# Altium PCB Transmitter.PcbDoc
Units mm, origin at the board's own origin, x right, y up, seen from the top; angles counter-clockwise.
Board outline 22.73 x 16.89 mm, 2 copper layers (Top Layer, Bottom Layer); 9 components, 9 nets, 44 pads, 2 vias.
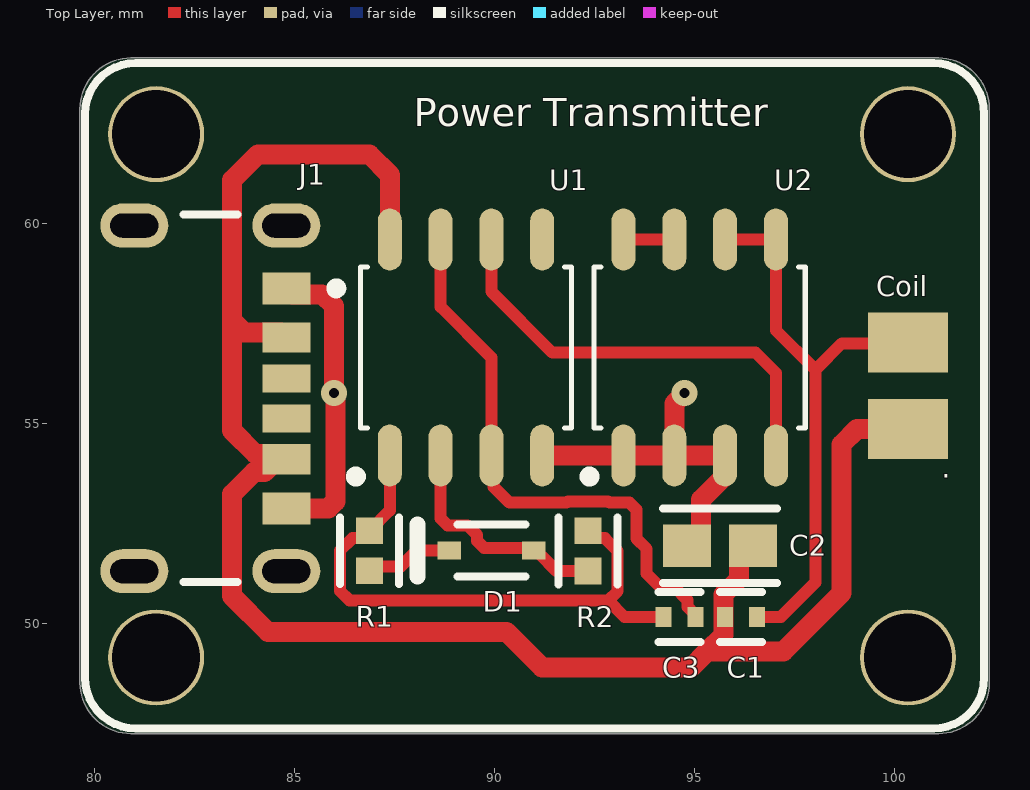
[diagram p0: Top Layer view]
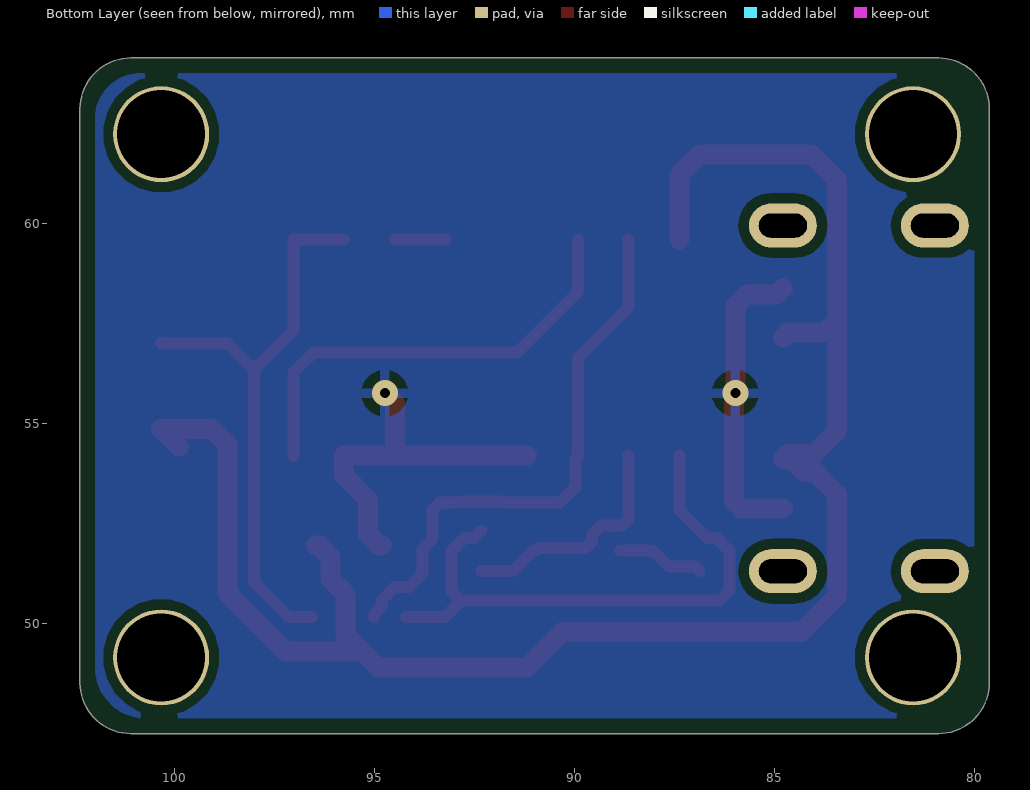
[diagram p1: Bottom Layer view, seen from below]
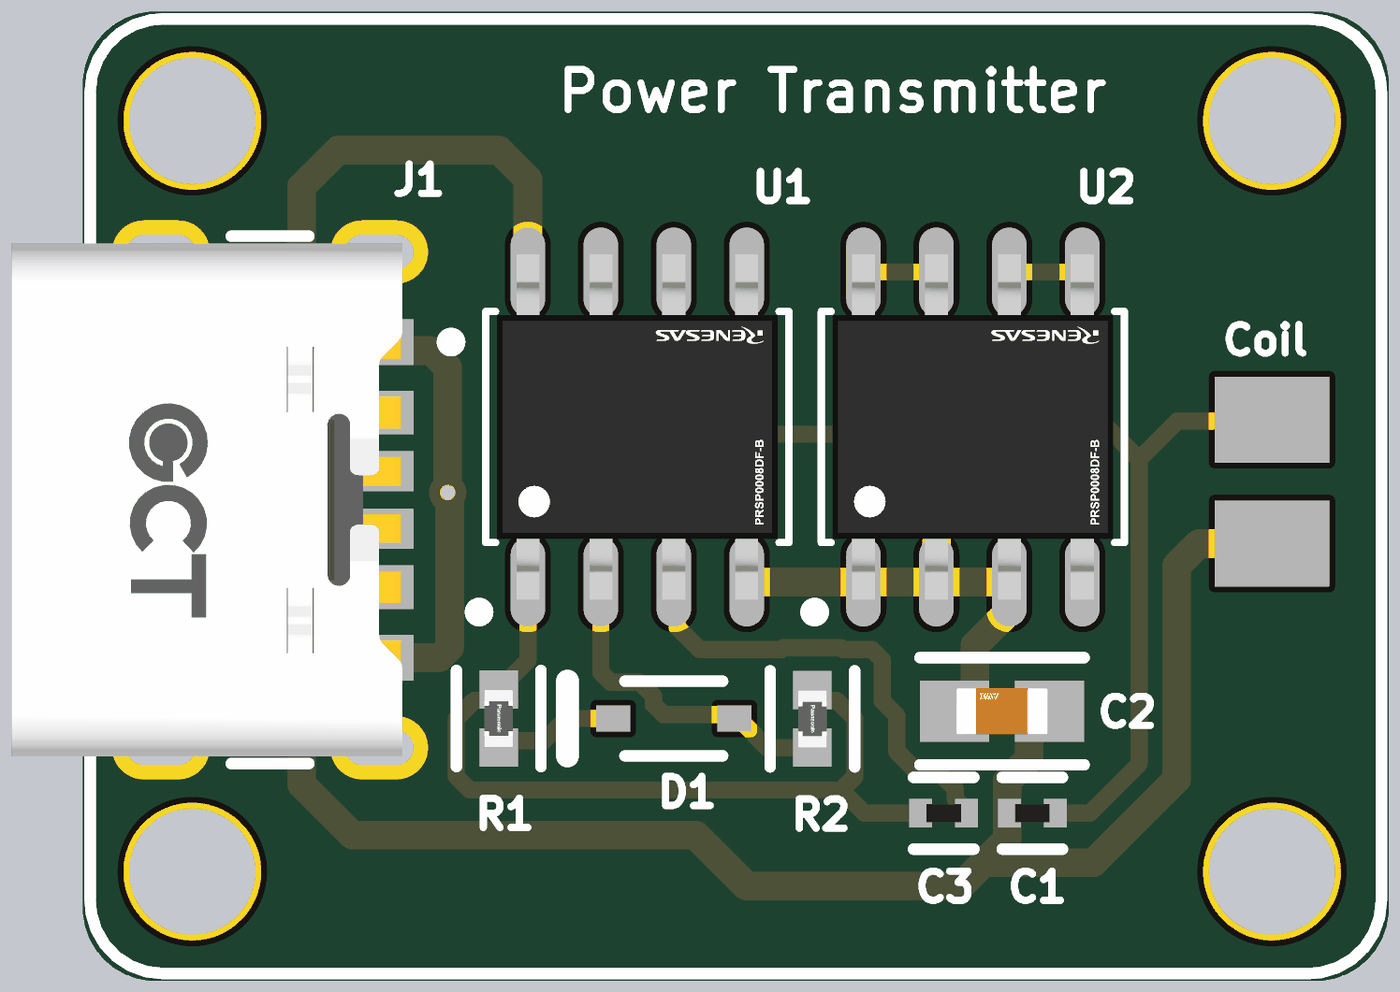
[diagram p2: 3D render of the assembled board from above, using the file's embedded part models]

## Layer stack, top to bottom
Top Solder: solder mask 0.0102, Solder Resist, Dk 3.5
Top Layer: signal copper 0.0356
Dielectric 1: dielectric 0.32, FR-4, Dk 4.8
Bottom Layer: signal copper 0.0356
Bottom Solder: solder mask 0.0102, Solder Resist, Dk 3.5

## Board outline
79.629,48.514 ccw(c80.899,48.514) 80.899,47.244 101.092,47.244 ccw(c101.092,48.514) 102.362,48.514 102.362,62.865 ccw(c101.092,62.865) 101.092,64.135 80.899,64.135 ccw(c80.899,62.865) 79.629,62.865

## Design rules (kind name [scope] priority, off if disabled: settings)
Clearance [All] p1: gap=0.1 ignorepadtopadclearanceinfootprint=FALSE
PolygonConnect [All] p1: connectstyle=Relief reliefconductorwidth=0.254 reliefentries=4 polygonreliefangle="90 Angle" airgapwidth=0.254
RoutingVias [All] p1: holewidth=0.711 width=1.27 viastyle="Through Hole" minholewidth=0.711 minwidth=1.27 maxholewidth=0.711 maxwidth=1.27
SilkToSilkClearance [All] p1: silktosilkclearance=0.2
SilkToSolderMaskClearance [IsPad] p1: minsilkscreentomaskgap=0.2 clearancetoexposedcopper=TRUE
SolderMaskExpansion [All] p1: expansion=0.102 istentingtop=FALSE
SupplyNets "Schematic Supply Nets_1" [InNet('+5V')] p1: voltage=0.000
SupplyNets "Schematic Supply Nets" [InNet('GND')] p2: voltage=0.000
Width [All] p1: maxlimit=0.5 minlimit=0.254 preferedwidth=0.3
28 further rules are at their usual default settings.

## Components (designator, comment, footprint, x,y, rotation, side; value= is the part's Value field where it differs from the comment)
C1 "39nF" FP-GRM15-MFG 96.158,50.165 r180 top value=0.10μF
C2 "10uF/25V" FP-0603-L_1_6_0_15-W_0_81-IPC_A 95.631,51.943 r180 top
C3 "120pF" FP-GRM15-MFG 94.615,50.165 r180 top value=0.10μF
D1 "1N4148WS-7-F" DIOD-SOD323-2-A_V 89.916,51.816 r180 top
J1 "USB4125-GF-A-0190" FP-USB4125-GF-A-0190-MFG 81.788,55.626 r270 top
R1 "10k" FP-ERJ2RK-IPC_A 86.868,51.816 r270 top
R2 "33k" FP-ERJ2RK-IPC_A 92.329,51.81 r270 top
U1 "XKT - 408" SOP127P600X173-8_PRSP0008DF-B_N 89.281,56.896 r90 top
U2 "T5336" SOP127P600X173-8_PRSP0008DF-B_N 95.123,56.896 r90 top

## Footprints (in the part's own frame and the unit in brackets; to place one, negate y for a bottom-side part, rotate by r counter-clockwise, add the part's x,y. Pads: shape width x height; smd on the part's side, far side on the other; paste and mask are expansions set on the pad)
DIOD-SOD323-2-A_V [mm] "SOD-323, 2-Leads, Body 1.7x1.3mm"
  rect 0.59x0.45 smd: 1(-1.055,0) 2(1.055,0)
  silkscreen extent -0.85,-0.65 1.85,0.65, body extent -0.85,-0.65 0.85,0.65, height 1.2
FP-0603-L_1_6_0_15-W_0_81-IPC_A [mil]
  rect 47.5x42.06 smd paste+0 mask+0: 1(-32.51,0) 2(32.51,0)
  silkscreen extent -56,-37 56,37, body extent -76,-41 76,41, height 10
FP-ERJ2RK-IPC_A [mm]
  rect 0.668x0.672 smd paste+0 mask+0: 1(-0.502,0) 2(0.502,0)
  silkscreen extent -0.84,-0.74 0.84,0.74, body extent -1.04,-0.54 1.04,0.54, height 0.25
FP-GRM15-MFG [mm]
  rect 0.4x0.5 smd paste+0 mask+0: 1(-0.4,0) 2(0.4,0)
  silkscreen extent -0.53,-0.63 0.53,0.63, body extent -0.7,-0.38 0.7,0.38, height 0.25
FP-USB4125-GF-A-0190-MFG [mm]
  rrect100% 1.1x1.7 hole 1.2 slot 0.6 at 0 deg paste-2539.97 mask+0: 1(-4.32,3) 2(4.32,3) 3(-4.32,-0.8) 4(4.32,-0.8)
  rect 0.7x1.2 smd paste+0 mask+0: A5(-0.5,3) B5(0.5,3)
  rect 0.76x1.2 smd paste+0 mask+0: A9(1.52,3) B9(-1.52,3)
  rect 0.8x1.2 smd paste+0 mask+0: A12(2.75,3) B12(-2.75,3)
  silkscreen extent -4.59,0.43 4.59,4.38, body extent -4.97,-3.57 4.97,3.95, height 0.25
SOP127P600X173-8_PRSP0008DF-B_N [mm] "SOP, 8-Leads, Body 5.02x3.90mm, Pitch 1.27mm, IPC Medium Density"
  rrect100% 1.55x0.6 smd: 1(-2.7,1.905) 2(-2.7,0.635) 3(-2.7,-0.635) 4(-2.7,-1.905) 5(2.7,-1.905) 6(2.7,-0.635) 7(2.7,0.635) 8(2.7,1.905)
  silkscreen extent -3.35,-2.64 2.01,2.88, body extent -3.72,-2.83 3.73,2.83, height 0.25

## Part data
C1 C3: library part CMP-2100-03641-2, "CAP CER 0.1UF 16V X7R 0402", Capacitance=0.10μF, Manufacturer=Murata, Manufacturer Part Number=GRM155R71C104KA88D, Package=GRM15, Temperature="-55°C to +125°C", Temperature Characteristic=X7R, Temperature Range High=+125°C, Temperature Range Low=-55°C, Tolerance=10%, Voltage Rating=16Vdc, Category=Cap, ComponentLink2Description=Datasheet, ComponentLink2URL=https://search.murata.co.jp/Ceramy/image/img/A01X/G101/ENG/GRM155R71H471KA01-01A.pdf, Device Class L1="Passive Components", Device Class L2=Capacitors, Device Class L3="Ceramic Capacitors", Digikey Description="CAP CER 0.1UF 16V X7R 0402", Height=0.55mm, Ipc Land Pattern Name=CAPC10050X219, Lead Free=yes, Material=Ceramic, Mouser Description="0402 0.1 uF 16V ±10 % Tolerance X7R SMT Multilayer Ceramic Capacitor", Octopart=https://octopart.com/grm155r71c104ka88d-murata-196880, RoHS=TRUE, Standoff Height=0mm
C2: library part CMP-2006-04378-2, "General Purpose Ceramic Capacitor, 0603, 1nF, 10%, X7R, 15%, 50V", Capacitance=1nF, Case Code (Imperial)=0603, Case Code (Metric)=1608, Dielectric=X7R, Dielectric Material=Ceramic, Max Operating Temperature=125°C, Min Operating Temperature=-55°C, Package Quantity=4000, Tolerance=10%, Voltage=50V, Case/Package=0603, Construction=Flat, Contact Plating=Tin, Depth=0.81mm, Height=0.9mm, Lead Free="Lead Free", Length=1.6mm, Mount="Surface Mount", Number of Pins=2, Packaging="Tape and Reel", Radiation Hardening=No, REACH SVHC="No SVHC", RoHS Compliant=Yes, Series=-, Termination=SMD/SMT, Thickness=0.035inch, Voltage Rating=50V, Voltage Rating (DC)=50V, Weight=7.1E-05oz, Width=0.032inch
D1: library part CMP-1667-00004-1, "Fast Switching Diode, 75 V, 0.3 A, -65 to 150 degC, 2-Pin SOD323, RoHS, Tape and Reel", ComponentLink1Description="Manufacturer URL", ComponentLink1URL=http://www.diodes.com/, ComponentLink2Description=Datasheet, ComponentLink2URL=http://www.diodes.com/datasheets/ds30097.pdf, DatasheetVersion="Rev. 25-2, 03/2016", PackageDescription="2-Pin Small Outline Diode, Body 1.7 x 1.3 mm", PackageReference=SOD323-2
J1: library part CMP-245163-000004-1, "CONN RCPT TYPE C 6P SMD RA"
R1 R2: library part CMP-1011-00415-3, "RES SMD 150 OHM 1% 1/10W 0402", Case Code (Imperial)=0402, Case Code (Metric)=1005, Max Operating Temperature=155°C, Max Power Dissipation=100mW, Min Operating Temperature=-55°C, Package Quantity=1, Resistance=150R, Resistance Tolerance=1%, Resistor Type="Thick Film", Temperature Coefficient=100ppm/°C, Voltage Rating=50V, Case/Package=0402, Construction=Rectangular, Contact Plating=Tin, Depth=0.5mm, Features="Automotive AEC-Q200", Height=0.35mm, Lead Free="Lead Free", Length=1mm, Military Standard=Not, Mount="Surface Mount", Number of Pins=2, Number of Terminations=2, Packaging="Tape and Reel", Power Rating=100mW, Radiation Hardening=No, REACH SVHC="No SVHC", RoHS Compliant=Yes, Series=ERJ, Size Code=0402, Technology="THICK FILM", Termination=SMD/SMT, Tolerance=1%, Voltage Rating (DC)=50V, Width=0.02inch
U1 U2: library part CMP-00572-21273503-1, "Serial Peripheral Interface 32k EEPROM (4-kword × 8-bit) 64k EEPROM (8-kword × 8-bit)", Case/Package=SOP, Frequency=5MHz, Manufacturer Lifecycle Status=ACTIVE, Max Input Voltage=5.5V, Max Operating Temperature=85°C, Min Input Voltage=1.8V, Min Operating Temperature=-40°C, China RoHS=Compliant, Clock Rate=3MHz, ComponentLink1Description="Manufacturer's Website", ComponentLink1URL=http://www.renesas.com, ComponentLink2Description="Datasheet URL", ComponentLink2URL=https://octopart.com/cad-content/api/get-model-datasheet/15189/21273503, ComponentLink3Description="Manufacturer's Package Drawing", ComponentLink3URL=https://www.renesas.com/en/document/psc/package-drawing-sop-8pin-prsp0008df-b, Height=1.73mm, HelpURL=https://octopart.com/cad-content/api/get-model-datasheet/15189/21273503, Interface=SPI, Lead Free="Lead Free", Length=5mm, Lifecycle Status=Production, Max Supply Voltage=5.5V, Memory Size=64kB, Memory Type=EEPROM, Min Supply Voltage=1.8V, Mount="Surface Mount", Number of Pins=8, Packaging="Tape & Reel (TR)", RoHS=Compliant, Width=4mm

## Free pads (board coordinates)
  round 2.4 hole 2.2 unplated: 10(100.33,49.149) 11(100.33,62.23) 12(81.534,62.23) 13(81.534,49.149)
  rect 2x1.5 smd: 14(100.33,57.023) 15(100.33,54.864)

## Via types
v1: diameter 0.65, hole 0.25, Top Layer to Bottom Layer, tented both sides, 2 vias

## Nets (pads, with @x,y where several pads share a name; then routed paths per layer and width w, separated by ;. In a path a pad name is that pad's centre, name@x,y a point inside that pad or via, vN(x,y) a via of type N, cw(c..) or ccw(c..) an arc to the next point about the centre after c; other vN are vias at no path point)
+5V: C1.2 C2.1 J1.A9 J1.B9 pad.15 U1.8 | length 45.8
  Top Layer w0.5: J1.B9 84.658,57.276 83.728,57.276 83.434,57.57 ; U1.8 87.376,61.214 86.868,61.722 84.074,61.722 83.434,61.082 83.434,57.57 ; C2.1 96.388,51.943 96.104,51.659 96.104,51.11 95.719,50.725 95.719,49.706 95.313,49.301 ; pad.15@99.886,54.42 pad.15 99.06,54.864 98.67,54.474 98.67,50.755 97.216,49.301 95.313,49.301 ; 83.434,57.57 83.434,54.817 84.015,54.236 84.658,54.236 J1.A9 84.568,54.106 84.242,53.78 83.979,53.78 83.434,53.235 83.434,50.678 84.328,49.784 90.297,49.784 91.186,48.895 94.908,48.895 95.313,49.301
GND: C2.2 J1.A12 J1.B12 U1.4 U2.1 U2.2 U2.3 | length 16.5
  Top Layer w0.5: J1.A12 85.838,52.876 86.014,53.052 v1@86.014,55.753 ; J1.B12 84.938,58.226 85.686,58.226 85.979,57.933 v1(85.979,55.753) ; U1.4 U2.1 U2.2 ; v1(94.742,55.753) 94.488,55.499 U2.2 ; C2.2 94.874,51.943 95.158,52.227 95.158,53.094 95.758,53.694 U2.3 U2.2
NetC1_1: C1.1 pad.14 U2.5 U2.6 | length 14.7
  Top Layer w0.3: U2.6 U2.5 97.028,57.327 98.016,56.339 ; C1.1 97.155,50.165 98.016,51.026 98.016,56.339 ; pad.14 100.306,56.999 98.676,56.999 98.016,56.339
NetC3_1: C3.1 U1.3 U1.7 | length 14.1
  Top Layer w0.3: U1.7 88.646,57.912 89.916,56.642 89.916,54.671 U1.3 89.973,54.139 89.973,53.41 90.366,53.017 91.792,53.017 91.825,53.05 92.833,53.05 92.866,53.017 93.368,53.017 93.544,52.841 93.544,52.118 93.798,51.864 93.798,51.242 94.127,50.912 94.489,50.912 94.819,50.582 94.819,50.411 95.015,50.215 C3.1
NetC3_2: C3.2 R1.1 R2.1 U1.1 | length 14.9
  Top Layer w0.3: R1.1 86.684,52.134 86.447,52.134 86.128,51.815 86.128,50.812 86.37,50.57 92.833,50.57 ; R1.1@86.87,52.318 87.376,52.824 U1.1 ; R2.1 R2.1@92.513,52.128 ; C3.2 93.237,50.165 92.833,50.57 ; R2.1@92.513,52.128 92.75,52.128 ; R2.1@92.513,52.128 92.75,52.128 ; 92.75,52.128 93.069,51.809 93.069,51.361 93.069,50.807 92.833,50.57
NetD1_1: D1.1 R2.2 U1.2 | length 5.9
  Top Layer w0.3: U1.2 88.646,52.621 88.822,52.445 89.323,52.445 89.56,52.208 89.56,52.06 89.736,51.884 90.903,51.884 D1.1 91.041,51.816 91.331,51.526 91.331,51.52 91.543,51.308 R2.2
NetD1_2: D1.2 R1.2 | length 2.2
  Top Layer w0.3: R1.2 86.98,51.426 87.654,51.426 88.044,51.816 D1.2
NetU1_6: U1.6 U2.4 | length 11.3
  Top Layer w0.3: U1.6 89.916,58.293 91.44,56.769 96.52,56.769 97.028,56.261 U2.4
NetU2_7: U2.7 U2.8 | length 1.3
  Top Layer w0.3: U2.8 U2.7
pads on no net: J1.1 J1.2 J1.3 J1.4 J1.A5 J1.B5 U1.5

## Polygon pours and split planes (outlines as drawn)
GND on Bottom Layer "GND_L02_P000" (solid, pour order 0): 100.838,63.754 cw(c100.838,62.611) 101.981,62.611 101.981,48.895 cw(c100.711,48.895) 100.711,47.625 81.28,47.625 cw(c81.28,48.895) 80.01,48.895 80.01,62.611 cw(c81.153,62.611) 81.153,63.754

## Silkscreen, mask and mechanical layers (free items; w line width, h text height)
Top Overlay:
  lines w0.2: 79.756,48.641 ccw(c81.026,48.641) 81.026,47.371 100.965,47.371 ccw(c100.965,48.641) 102.235,48.641 102.235,62.738 ccw(c100.965,62.738) 100.965,64.008 91.694,64.008 81.026,64.008 ccw(c81.026,62.738) 79.756,62.738 79.756,48.641
  text "Power Transmitter" at 87.978,62.426 h0.7
  text "Coil" at 99.539,58.181 h0.5
  text "." at 101.177,53.645 h0.5
Mechanical 1:
  lines w0.2: 79.629,48.514 ccw(c80.899,48.514) 80.899,47.244 101.092,47.244 ccw(c101.092,48.514) 102.362,48.514 102.362,62.865 ccw(c101.092,62.865) 101.092,64.135 82.296,64.135 80.899,64.135 ccw(c80.899,62.865) 79.629,62.865 79.629,48.514